# Altium PCB sixuanyi.PcbDoc
Units mil, origin at the board's own origin, x right, y up, seen from the top; angles counter-clockwise.
Board outline 6000 x 4000 mil, 2 copper layers (Top Layer, Bottom Layer); 73 components, 73 nets, 288 pads, 91 vias.
Unrouted connection lines stored in the file: 7.
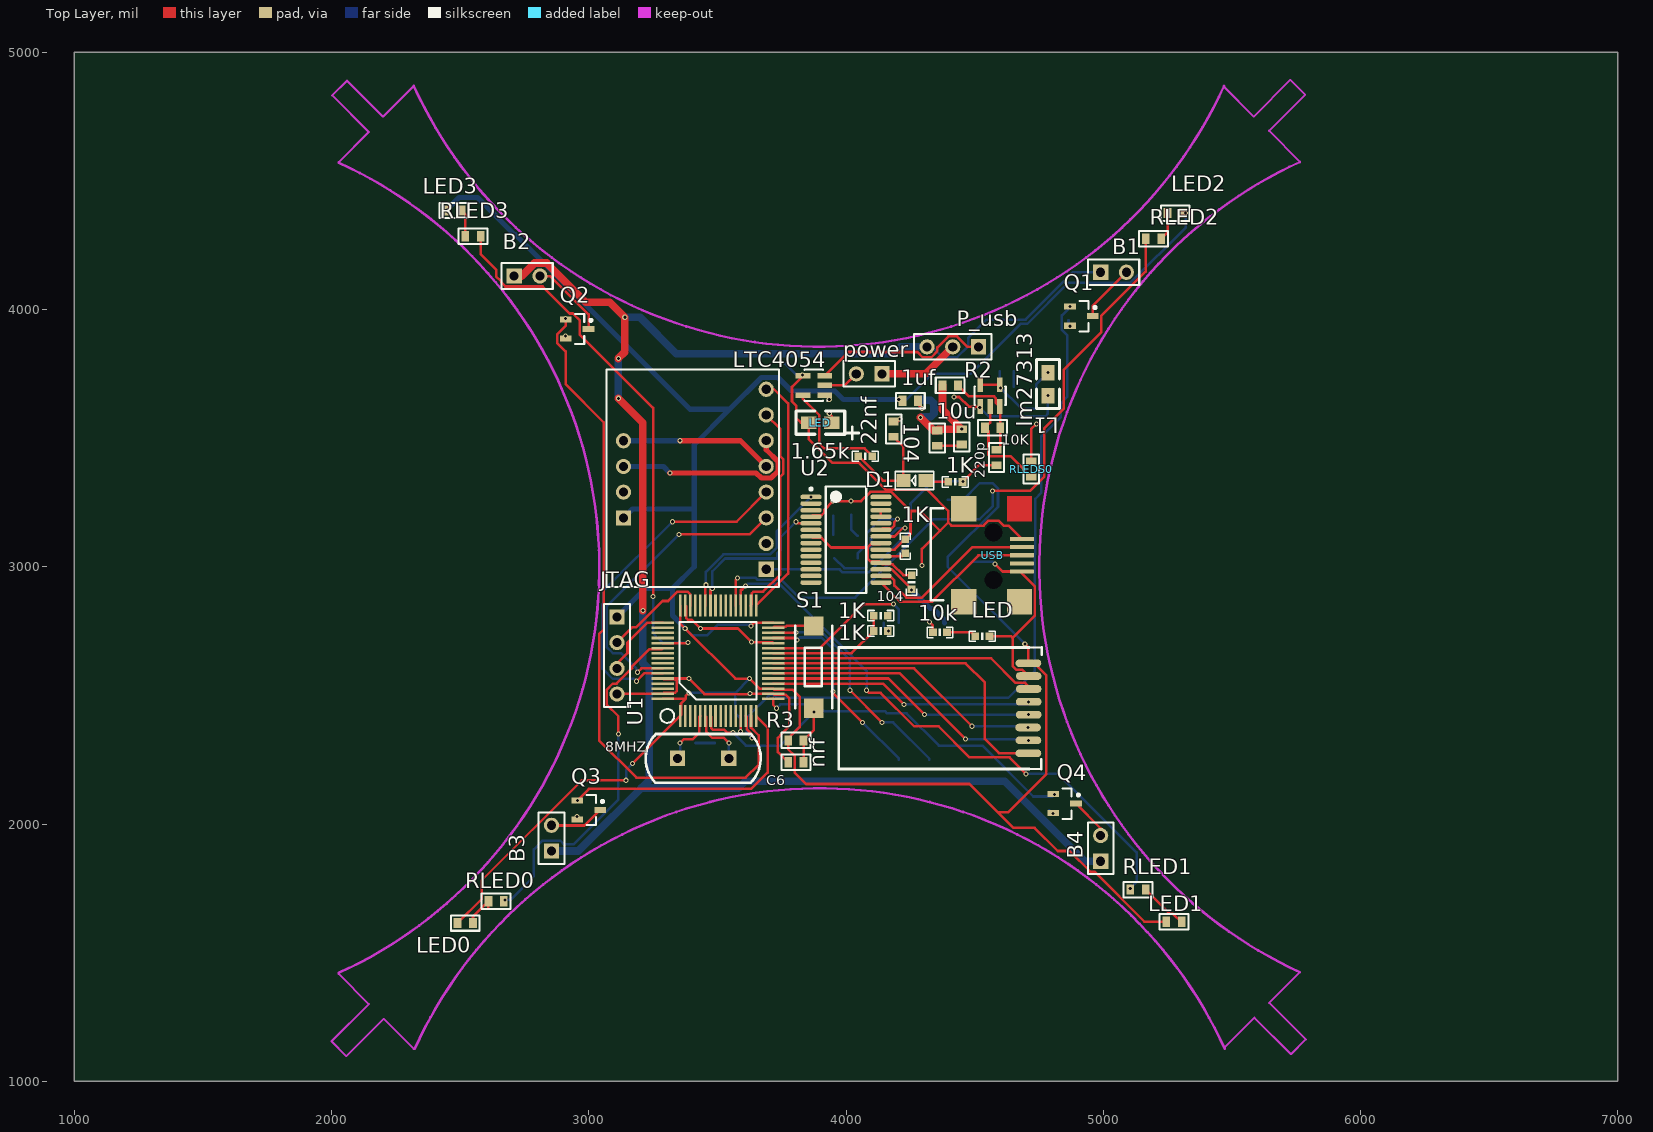
[diagram p0: Top Layer view]
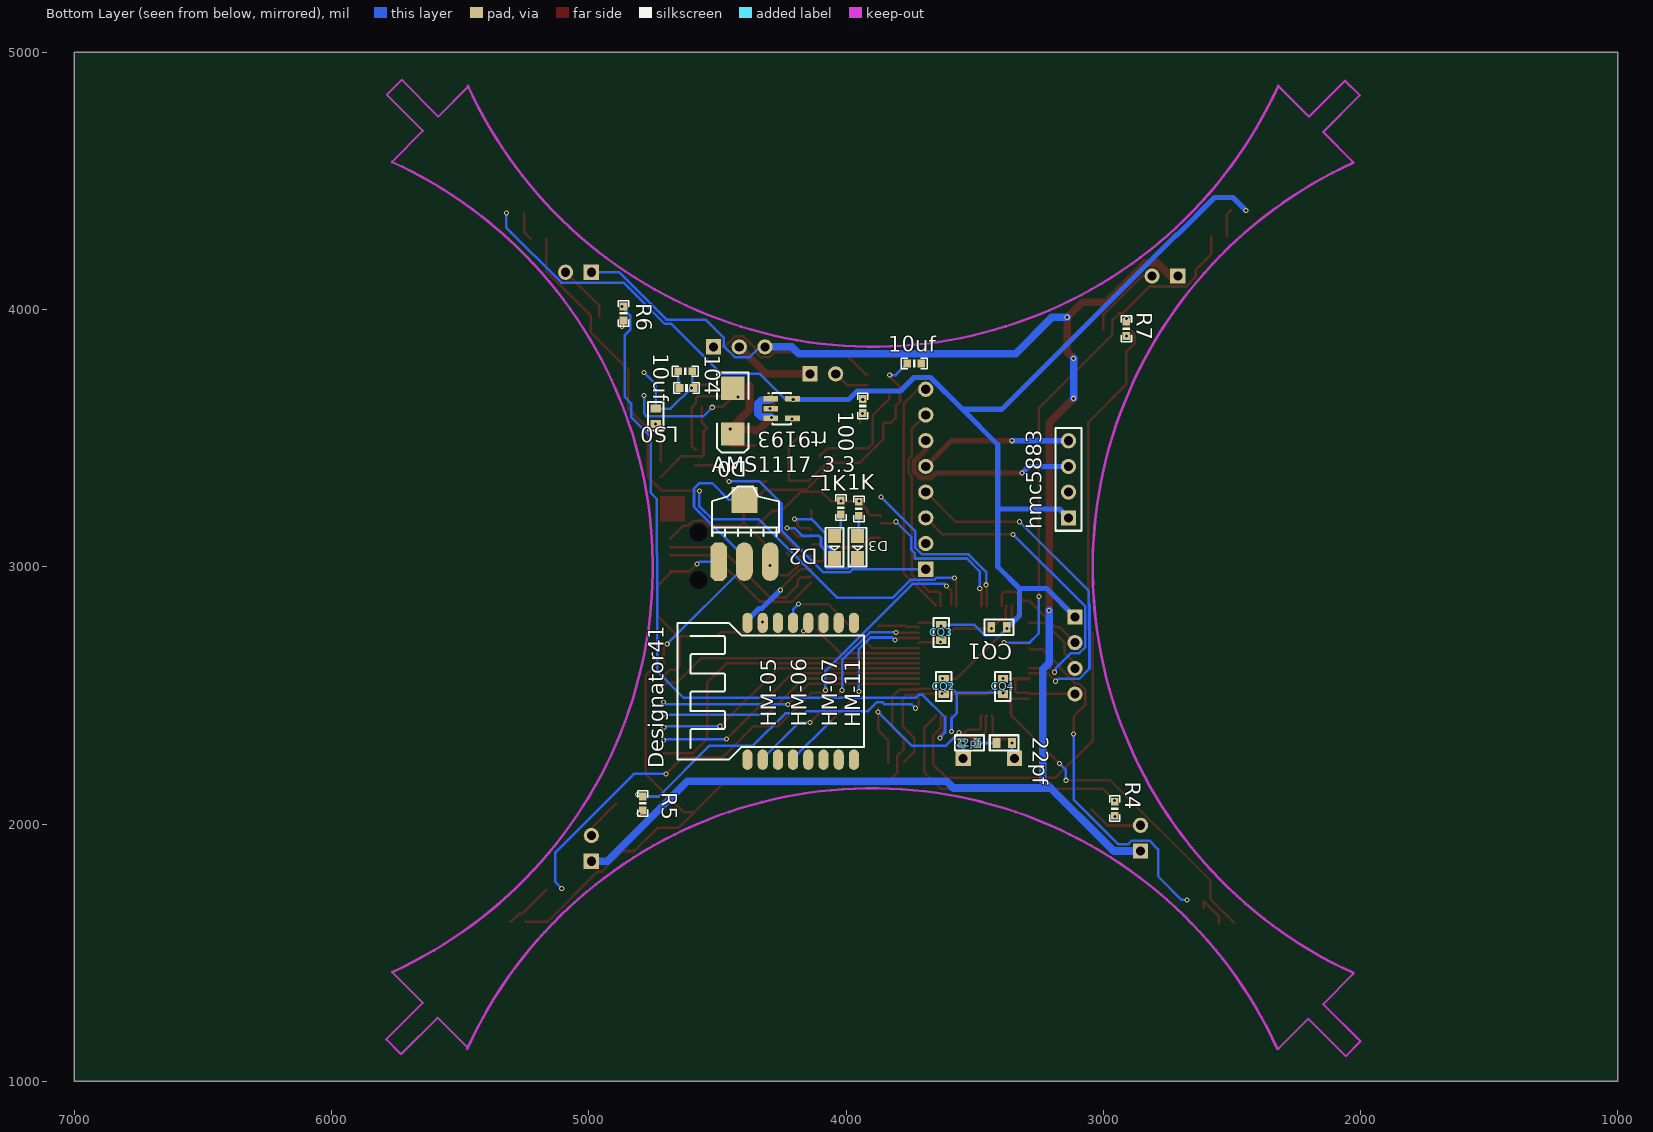
[diagram p1: Bottom Layer view, seen from below]

## Layer stack, top to bottom
Top Layer: signal copper 1.4
Dielectric: dielectric 12.6, FR-4, Dk 4.8
Bottom Layer: signal copper 1.4

## Board outline
1000,1000 7000,1000 7000,5000 1000,5000

## Design rules (kind name [scope] priority, off if disabled: settings)
Clearance [All] p1: gap=6
PolygonConnect [All] p1: connectstyle=Relief reliefconductorwidth=10 reliefentries=4 polygonreliefangle="90 Angle"
RoutingVias [All] p1: holewidth=28 width=50 viastyle="Through Hole" minholewidth=28 minwidth=50 maxholewidth=28 maxwidth=50
SilkscreenOverComponentPads SilkToSolderMaskClearance [IsPad] p1: minsilkscreentomaskgap=10
SolderMaskExpansion [All] p1: expansion=4
Width [All] p1: maxlimit=30 minlimit=10 preferedwidth=10
27 further rules are at their usual default settings.

## Classes and differential pairs
component class sixuanyi: 1.65k 1K 8MHZ 10K 10u 10uf 22pf 100 104 220p B2 C6 CQ1 CQ2 CQ3 CQ4 D0 D1 D2 D3 JTAG L1 LED LED0 LED1 LED2 LED3 lm27313 LS0 LTC4054 P_usb power Q1 Q2 Q3 Q4 R2 R3 RLED0 RLED1 RLED2 RLED3 RLEDS0 rt9193 S1 U1 U2 USB

## Components (designator, comment, footprint, x,y, rotation, side; value= is the part's Value field where it differs from the comment)
1.65k "R_USB1" 0603p 4075,3430 r0 top (schematic designator R_USB1)
1K "Comment" 0603p 4135,2750 r0 top
1K "Comment" 0603p 4135,2810 r0 top
1K "1K" 0603p 3950,3225 r90 bottom (schematic designator R_ttl4)
1K "1K" 0603p 4020,3230 r90 bottom (schematic designator R_ttl3)
1K "1K" 0603p 4230,3080 r90 top (schematic designator R_ttl2)
1K "1K" 0603p 4425,3330 r0 top (schematic designator R_ttl1)
1uf "Comment" 0603_WYN 4250,3645 r0 top
8MHZ "8MHZ" XTAL_D 3345,2255 r0 top
10k "Comment" 0603p 4365,2745 r0 top
10K "10K" 0603_WYN 4570,3540 r0 top (schematic designator R1)
10u "10uF" 0603_WYN 4450,3505 r270 top (schematic designator C3)
10uf "C_usb1_10uf" 0603p 3735,3790 r180 bottom (schematic designator C_usb1_10uf)
10uf "10uF" 0603p 4620,3695 r180 bottom (schematic designator C1)
22nf "Comment" 0603_WYN 4185,3535 r90 top
22pf "22pF" 0603_WYN 3520,2315 r180 bottom (schematic designator Cpf2)
22pf "22pF" 0603_WYN 3385,2315 r180 bottom (schematic designator Cpf1)
100 "R_usb2" 0603p 3935,3625 r270 bottom (schematic designator R_usb2)
104 "104" 0603P 4255,2940 r90 top (schematic designator C_usb1)
104 "104" 0603_WYN 4355,3500 r270 top (schematic designator C4)
104 "104" 0603p 4625,3760 r180 bottom (schematic designator C2)
220p "220pF" 0603_WYN 4585,3425 r90 top (schematic designator C5)
AMS1117_3.3 "Comment" AMS1117 4495,3020 r180 bottom
B1 "Comment" HDR1X2 4990,4145 r0 top
B2 "Comment" HDR1X2 2710,4130 r0 top
B3 "Comment" HDR1X2 2855,1895 r90 top
B4 "Comment" HDR1X2 4990,1855 r90 top
C6 "104" 0603_WYN 3805,2240 r180 top
CQ1 "104" 0603_WYN 3405,2765 r0 bottom
CQ2 "104" 0603_WYN 3620,2535 r270 bottom
CQ3 "104" 0603_WYN 3630,2745 r270 bottom
CQ4 "104" 0603_WYN 3390,2535 r90 bottom
D0 "MBR0520" SMB 4440,3605 r270 bottom
D1 "LED2" SMDLED 4310,3335 r180 top
D2 "LED2" SMDLED 4045,3120 r270 bottom
D3 "LED2" SMDLED 3955,3120 r270 bottom
Designator41 "Comment" HM_05_06_07_11 3930,2250 r90 bottom
hmc5883 "Comment" HDR1X4 3135,3190 r90 bottom
JTAG "Header 4" HDR1X4 3110,2805 r270 top
L1 "Inductor" 0805_WYN 4785,3755 r270 top
LED "Comment" 0603p 4530,2730 r0 top
LED "黄灯" 极性0805_WYN 3945,3560 r180 top (schematic designator LED_usb)
LED0 "绿灯" 0603_WYN 2520,1615 r0 top
LED1 "绿灯" 0603_WYN 5275,1620 r0 top
LED2 "绿灯" 0603_WYN 5280,4375 r180 top
LED3 "绿灯" 0603_WYN 2475,4385 r0 top
lm27313 "LM27313" SOT23-6 4560,3665 r0 top (schematic designator E_TURN1)
LS0 "绿灯" 0603_WYN 4740,3585 r270 bottom
LTC4054 "LTC4054" SOT23-6 3875,3705 r90 top
nrf "Comment" 24L01-L 4700,2450 r90 top
P_usb "P_usb" HDR1X3 4515,3855 r180 top
power "Header2" HDR1X2 4140,3750 r180 top
Q1 "JFET-N" SI2302 4915,3975 r0 top
Q2 "JFET-N" SI2302 2955,3925 r0 top
Q3 "JFET-N" SI2302 3000,2055 r0 top
Q4 "JFET-N" SI2302 4850,2080 r0 top
R2 "33K" 0603_WYN 4405,3705 r180 top
R3 "10K" 0603_WYN 3805,2325 r180 top
R4 "Comment" 0603p 2955,2060 r270 bottom
R5 "Comment" 0603p 4790,2080 r270 bottom
R6 "Comment" 0603p 4865,3985 r270 bottom
R7 "Comment" 0603p 2910,3925 r270 bottom
RLED0 "10R" 0603_WYN 2640,1700 r180 top
RLED1 "10R" 0603_WYN 5135,1745 r0 top
RLED2 "10R" 0603_WYN 5195,4275 r0 top
RLED3 "10R" 0603_WYN 2550,4285 r180 top
RLEDS0 "10R" 0603_WYN 4720,3380 r90 top
rt9193 "RT9193" SOT23-6 4250,3615 r270 bottom (schematic designator E_TURN2)
S1 "SW-PB" CLICK 3875,2450 r90 top
U1 "STM32_F103" LQFP64 3355,2420 r90 top
U2 "FT232RL" SSOP-28 4000,3105 r0 top
USB "usb mini" "USB - duplicate1" 4625,3275 r270 top
? "Comment" HDR1X8 3680,3000 r90 top

## Footprints (in the part's own frame and the unit in brackets; to place one, negate y for a bottom-side part, rotate by r counter-clockwise, add the part's x,y. Pads: shape width x height; smd on the part's side, far side on the other; paste and mask are expansions set on the pad)
24L01-L [mil]
  oval 30x100 smd: 1(175.17,-9.06) 2(125,-10) 3(75,-10) 4(25,-10) 5(-25,-10) 6(-74.8,-7.87) 7(-124.83,-9.06) 8(-174.83,-9.06)
  silkscreen extent -236,-61 236,728
0603_WYN [mil]
  rect 30x40 smd: 1(-30,0) 2(30,0)
  silkscreen extent -56,-30 56,30
0603p [mil]
  rect 30x30 smd: 1(-27,0) 2(27.5,-0.06)
  silkscreen extent -50,-20 50,20
0603P [mil]
  rect 30x30 smd: 1(-27,0) 2(27.5,-0.06)
  silkscreen extent -50,-20 50,20
0805_WYN [mil]
  rect 60x50 smd: 1(0,0) 2(90,0)
  silkscreen extent -50,-45 140,45
AMS1117 [mil]
  oct 65x150 smd: 1(0.03,-0.06)
  oval 65x150 smd: 2(100.03,-0.06) 3(200.03,-0.06)
  rect 100x100 smd: 4(100.03,239.94)
  silkscreen extent -26,100 234,293
CLICK [mil]
  rect 75x75 smd: 1(0,0) 2(320,0)
  silkscreen extent 0,-72 320,72
HDR1X2 [mm] "Connector; Header; 2 Posi"
  rect 1.5x1.5 hole 0.9: 1(0,0)
  round 1.5 hole 0.9: 2(2.54,0)
  silkscreen extent -1.27,-1.27 3.81,1.27
HDR1X3 [mm] "Connector; Header; 3 Position"
  rect 1.5x1.5 hole 0.9: 1(0,0)
  round 1.5 hole 0.9: 2(2.54,0) 3(5.08,0)
  silkscreen extent -1.27,-1.27 6.35,1.27
HDR1X4 [mm] "Connector; Header; 4 Position"
  rect 1.5x1.5 hole 0.9: 1(0,0)
  round 1.5 hole 0.9: 2(2.54,0) 3(5.08,0) 4(7.62,0)
  silkscreen extent -1.27,-1.27 8.89,1.27
HDR1X8 [mm]
  rect 1.5x1.5 hole 0.9: 1(-0.25,-0.25)
  round 1.5 hole 0.9: 2(2.29,-0.25) 3(4.83,-0.25) 4(7.37,-0.25) 5(9.91,-0.25) 6(12.45,-0.25) 7(14.99,-0.25) 8(17.53,-0.25)
  silkscreen extent -2,-1.52 19.5,15.5
HM_05_06_07_11 [mm]
  oval 2x1 smd: 1(0,11.5) 2(0,10) 3(0,8.5) 4(0,7) 5(0,5.5) 6(0,4) 7(0,2.5) 8(0,1) 9(13.513,1) 10(13.513,2.5) 11(13.513,4) 12(13.513,5.5) 13(13.513,7) 14(13.513,8.5) 15(13.513,10) 16(13.513,11.5)
  silkscreen extent 0,0 13.51,18.41
LQFP64 [mm] "LQFP6"
  rect 2.2x0.254 smd: 1(0,0) 2(0,-0.5) 3(0,-1) 4(0,-1.5) 5(0,-2) 6(0,-2.5) 7(0,-3) 8(0,-3.5) 9(0,-4) 10(0,-4.5) 11(0,-5) 12(0,-5.5) 13(0,-6) 14(0,-6.5) 15(0,-7) 16(0,-7.5) 33(10.9,-7.5) 34(10.9,-7) 35(10.9,-6.5) 36(10.9,-6) 37(10.9,-5.5) 38(10.9,-5) 39(10.9,-4.5) 40(10.9,-4) 41(10.9,-3.5) 42(10.9,-3) 43(10.9,-2.5) 44(10.9,-2) 45(10.9,-1.5) 46(10.9,-1) 47(10.9,-0.5) 48(10.9,0)
  rect 0.254x2.2 smd: 17(1.7,-9.2) 18(2.2,-9.2) 19(2.7,-9.2) 20(3.2,-9.2) 21(3.7,-9.2) 22(4.2,-9.2) 23(4.7,-9.2) 24(5.2,-9.2) 25(5.7,-9.2) 26(6.2,-9.2) 27(6.7,-9.2) 28(7.2,-9.2) 29(7.7,-9.2) 30(8.2,-9.2) 31(8.7,-9.2) 32(9.2,-9.2) 49(9.2,1.7) 50(8.7,1.7) 51(8.2,1.7) 52(7.7,1.7) 53(7.2,1.7) 54(6.7,1.7) 55(6.2,1.7) 56(5.7,1.7) 57(5.2,1.7) 58(4.7,1.7) 59(4.2,1.7) 60(3.7,1.7) 61(3.2,1.7) 62(2.7,1.7) 63(2.2,1.7) 64(1.7,1.7)
  silkscreen extent -0.68,-7.56 9.26,1.95
SI2302 [mm]
  rect 1.15x0.6 smd: 1(1.122,-0.016) 2(-1.128,0.934) 3(-1.128,-0.966)
  silkscreen extent -0.2,-1.52 1.47,1.48, body extent -0.7,-1.52 0.7,1.48, height 1.1
SMB [mm] "DO-214-AA/SMB; 2 C-Bend Leads; Body 5.3 x 3.6 mm, inc. leads (LxW)"
  rect 2.3x2.3 smd: 1(-2.25,0) 2(2.25,0)
  silkscreen extent -3.8,-1.55 4.1,1.55
SMDLED [mm]
  rect 1.4x1.27 smd: 1(0.001,-0.002) 2(2.211,-0.002)
  silkscreen extent -0.8,-0.89 3.01,0.89
SOT23-6 [mm] "SOT-23/SC-74A; 5 Leads; Body 3.1 x 3 mm, inc. leads (Lx"
  rect 0.55x1.45 smd: 1(-0.95,-1.075) 2(0,-1.075) 3(0.95,-1.075) 4(0.95,1.075) 5(-0.95,1.075)
  silkscreen extent -1.57,-1.35 1.55,0.9
SSOP-28 [mm] "FT232"
  oval 2.1x0.45 smd: 1(-3.45,4.225) 2(-3.45,3.575) 3(-3.45,2.925) 4(-3.45,2.275) 5(-3.45,1.625) 6(-3.45,0.975) 7(-3.45,0.325) 8(-3.45,-0.325) 9(-3.45,-0.975) 10(-3.45,-1.625) 11(-3.45,-2.275) 12(-3.45,-2.925) 13(-3.45,-3.575) 14(-3.45,-4.225) 15(3.45,-4.225) 16(3.45,-3.575) 17(3.45,-2.925) 18(3.45,-2.275) 19(3.45,-1.625) 20(3.45,-0.975) 21(3.45,-0.325) 22(3.45,0.325) 23(3.45,0.975) 24(3.45,1.625) 25(3.45,2.275) 26(3.45,2.925) 27(3.45,3.575) 28(3.45,4.225)
  silkscreen extent -3.57,-5.25 2,5.25, body extent -2.8,-5.25 2.8,5.25, height 2
"USB - duplicate1" [mm]
  rect 0.4x2.4 smd: 1(4.25,1.5) 2(5.05,1.5) 3(5.85,1.5) 4(6.65,1.5) 5(7.45,1.5)
  rect 2.5x2.5 smd: ""(1.25,-4.25) ""(10.45,1.25) ""(10.45,-4.25)
  round 0 hole 1.8: ""(3.6,-1.3) ""(8.3,-1.3)
  Top Layer region: 0,0 2.5,0 2.5,2.5 0,2.5
  silkscreen extent 1.2,-7.5 10.3,-6.3
XTAL_D [mil]
  rect 60x60 hole 36 paste+0: 1(0,0) 2(200,0)
  silkscreen extent -124,-95 324,95
极性0805_WYN [mil]
  rect 60x50 smd: 1(0,0) 2(90,0)
  silkscreen extent -105,-45 140,65

## Part data
1.65k 100: library part Res2, "Resisto"
1K 1K 1K 1K: library part Res2, "Resis"
8MHZ: library part XTAL, "Crystal Oscillato"
10K R2 R3 RLED0 RLED1 RLED2 RLED3 RLEDS0: library part RES_WYN
10u 22pf 22pf 104 220p C6 CQ1 CQ2 CQ3 CQ4: library part CAP_WYN
10uf: library part Cap, "Capacito"
10uf 104 104: library part CAP_WY
D0: library part "D Schottky", "Schottky Diode"
D1 D2 D3: "Typical RED, GREEN, YELLOW, AMBER GaAs LED"
JTAG: "Header, 4-Pin"
L1: "Inducto"
LED: library part LED1, "Typical RED GaA"
LED0 LED1 LED2 LED3 LS0: library part LED_WYN, "Typical RED, GREEN, YELLOW, AMBER GaAs LED"
P_usb: library part "Header 3", "Header, 3-Pin"
Q1 Q2 Q3 Q4: "N-Channel JFET"
S1: "Switch"

## Via types
v1: diameter 19.68, hole 11.81, Top Layer to Bottom Layer, 91 vias

## Nets (pads, with @x,y where several pads share a name; then routed paths per layer and width w, separated by ;. In a path a pad name is that pad's centre, name@x,y a point inside that pad or via, vN(x,y) a via of type N, cw(c..) or ccw(c..) an arc to the next point about the centre after c; other vN are vias at no path point)
AD0: ?.7 U1.34 | length 842.4
  Top Layer w10: U1.34 3634.28,2852.82 3634.28,2897 3640.72,2903.44 3677.74,2903.44 3745,2970.7 3745,3351.23 3756.37,3362.6 3756.37,3417.71 3745,3429.08 3745,3535 ?.7
ADC: 1K.1@4108,2750 1K.1@4108,2810 U1.26 | length 486.4
  Top Layer w10: U1.26 4022.09,2664.09 4108,2750 1K.1@4108,2810
BAT: P_usb.2 power.1 | length 318.5
  Top Layer w30: power.1 4310,3750 P_usb.2
CHG5V: 1K.2@3949.94,3252.5 1K.2@4019.94,3257.5 1K.2@4230.06,3107.5 10uf.1@3762,3790 AMS1117_3.3.3 LED.2@3855,3560 LTC4054.4 U2.4 U2.20 USB.1 | length 2490.4
  Top Layer w10: LTC4054.4 3790,3699.72 3790,3642.63 3806,3626.63 3806,3579 3825,3560 3855,3560 3855,3497.37 3948.37,3404 4051.37,3404 4156.31,3299.06 4315.94,3299.06 4397.46,3217.54 4397.46,3172.02 ; U2.4 3869.91,3200.3 3904.88,3200.3 3916.51,3211.93 3916.51,3221.51 v1(3950,3255) 4058.92,3255 4095.12,3291.2 4176.53,3291.2 4250.84,3216.89 ; U2.20 4189.18,3066.61 4230.06,3107.5 4250.84,3128.28 4250.84,3216.89 ; v1(4295,3005) 4295,3069.55 4365.45,3140 ; USB.1 4631.73,3160 4612.75,3160 4593.05,3179.7 4554.59,3179.7 4534.88,3160 4409.48,3160 4397.46,3172.02 ; 4250.84,3216.89 4288.56,3216.89 4365.45,3140 ; 4365.45,3140 4397.46,3172.02
  Bottom Layer w10: 10uf.1@3762,3790 3807,3745 v1(3830,3745) ; v1(4295,3005) AMS1117_3.3.3
  other v1: 4020,3255
D+: U2.15 USB.3 | length 654
  Top Layer w10: U2.15 4210.49,2864 4301.63,2864 4302.63,2865 4335,2865 4514.69,3044.68 USB.3
D-: U2.16 USB.2 | length 676.1
  Top Layer w10: U2.16 4141.56,2958.52 4176.53,2958.52 4188.17,2946.89 4188.17,2926.83 4235,2880 4295,2880 4491.18,3076.18 USB.2
GND: 1.65k.1 1K.2@4162.5,2749.94 1uf.2 10K.1 10u.2 10uf.1@4647,3695 10uf.2@3707.5,3789.94 22nf.1 22pf.1@3415,2315 22pf.2@3490,2315 104.1@4652,3760 104.2@4255.06,2967.5 104.2@4355,3470 ?.2 AMS1117_3.3.1 C6.2 CQ1.2 CQ2.2 CQ3.2 CQ4.2 D1.2 Designator41.12 hmc5883.2 JTAG.4 LED.2@4557.5,2729.94 lm27313.2 LTC4054.2 nrf.2 power.2 Q1.3 Q2.3 Q3.3 Q4.3 R4.2 R5.2 R6.2 R7.2 RLEDS0.1 rt9193.2 S1.2 U1.18 U1.28 U1.31 U1.47 U1.60 U1.63 U2.7 U2.18 U2.21 U2.25 U2.26 USB.5 | length 4371.1
  Top Layer w10: JTAG.4 3111.61,2506.61 U1.63 3291.76,2510.3 3335.93,2510.3 3342.38,2516.74 3342.38,2555.54 3335.93,2561.98 3291.76,2561.98 U1.60 v1(3389.33,2565.67) ; U1.47 3378.37,2845.45 3378.37,2801.27 3384.81,2794.83 3400.17,2794.83 v1(3435,2760) 3580,2760 v1(3632.85,2707.15) 3713.52,2707.15 U1.28 ; v1@3390,2565 3450,2505 3625,2505 v1(3626.61,2506.61) U1.18 3720.89,2502.93 3765.07,2502.93 3780,2488 3780,2380.56 3749,2349.56 3749,2349 3735,2335 3735,2280 C6.2 ; U1.31 3720.89,2766.2 3765.07,2766.2 3768.86,2770 S1.2 ; U2.7@3869.91,3112.06 3904.88,3112.06 3942.1,3074.84 4083.49,3074.84 ; LTC4054.2 3995,3705 power.2 ; 1.65k.1 4142.94,3335.06 D1.2 4222.96,3467.04 22nf.1 ; U2.21@4131.97,3088.35 4097,3088.35 4083.49,3074.84 ; U2.25 U2.26 ; 104.2@4255.06,2967.5 4223.13,2967.5 4180.93,3009.7 4141.56,3009.7 U2.18 4130.09,3021.17 4095.12,3021.17 4083.49,3032.8 4083.49,3074.84 ; 1uf.2 4280,3630 v1(4295,3615) ; 104.2@4355,3470 10u.2@4445,3470 ; LED.2@4557.5,2729.94 4641.56,2729.94 4648.06,2723.44 ; lm27313.2 4560,3560 10K.1 4554,3526 4554,3435.44 4560.44,3429 4641,3429 RLEDS0.1 ; v1(4580,3010) 4608.31,2981.69 USB.5 4684.06,2974.17 4734.43,2923.8 4734.43,2809.81 4648.06,2723.44 ; nrf.2 4685.83,2599.17 4663.29,2599.17 4648.06,2614.4 4648.06,2723.44
  Bottom Layer w10: 22pf.1@3415,2315 22pf.2@3490,2315 ; Designator41.12 4146.53,2768.47 v1(4165,2750) ; AMS1117_3.3.1 4570.06,3019.94 v1(4580,3010) ; 10uf.1@4652,3700 104.1@4652,3760 ; R5.2 4802.56,2040 v1(4805,2040) ; R6.2 4865.06,3939.94 v1(4870,3935)
  other v1: 2955,2030 2910.06,3897.5
IIC_SCL: ?.3 U1.58 | length 1191.8
  Top Layer w10: v1(3190,2590) 3205.04,2605.04 U1.58 ; v1(3350,3126.06) 3625.74,3126.06 ?.3
  Bottom Layer w10: v1(3190,2590) 3185.04,2594.96 3185.04,2605.04 3125.61,2664.47 3093.21,2664.47 3069.47,2688.21 3069.47,2845.53 v1(3350,3126.06)
IIC_SDA: ?.4 U1.59 | length 1363.4
  Top Layer w10: v1(3185,2555) 3215.35,2585.35 U1.59 ; v1(3325,3175) 3574.68,3175 ?.4
  Bottom Layer w10: v1(3185,2555) 3175.53,2564.47 3093.21,2564.47 3053.47,2604.21 3053.47,2854.37 3055.69,2856.58 3055.69,2905.69 v1(3325,3175)
INT: ?.8 U1.33 | length 945.5
  Top Layer w10: U1.33 3775,2973.86 3775,3635 3719.84,3690.16 ?.8
JTCK: JTAG.3 U1.49 | length 286.6
  Top Layer w10: JTAG.3 3110,2623.94 3150.53,2664.47 3150.53,2705.53 3227.2,2782.2 U1.49
JTDI: U1.50
JTDO: U1.55
JTMS: JTAG.2 U1.46 | length 414.9
  Top Layer w10: JTAG.2 3170,2765 3185,2765 3286.88,2866.88 3308.88,2866.88 3345.44,2903.44 3384.24,2903.44 3394.37,2893.31 U1.46
JTRST: U1.56
LED0: RLED0.1 U1.54 | length 1409.8
  Top Layer w10: v1(3115,2350) 3115,2418.94 3069.47,2464.47 3069.47,2521.79 3093.21,2545.53 3107.84,2545.53 3168.13,2605.82 3168.13,2612.04 3236.19,2680.09 3284.39,2680.09 U1.54
  Bottom Layer w10: v1(2675,1705) 2695,1705 2786.91,1796.91 2786.91,1901.53 2820.92,1935.53 2889.08,1935.53 2903.61,1921 2941,1921 3115,2095 v1(3115,2350)
LED1: RLED1.1 U1.36 | length 2231.7
  Top Layer w10: U1.36@3591.22,2854.13 3591.22,2911.22 3596.22,2911.22 v1(3610,2925) ; v1(4080,2520) 4090,2510 4135,2510 4265,2380 4360,2380 4480.83,2259.17 4635.83,2259.17 v1(4700,2195)
  Bottom Layer w10: v1(3610,2925) 3618.63,2933.63 3741.37,2933.63 4080,2595 v1(4080,2520) ; v1(4700,2195) 4825,2195 5130,1890 5130,1775 v1(5105,1750)
LED2: RLED2.1 U1.37 | length 2653
  Top Layer w10: U1.37 3571.53,2950.35 v1(3578.09,2956.91) ; v1(4570,3295) 4715.56,3295 4769.89,3349.33 4769.89,3537.35 4846.2,3613.67 4846.2,3765.15 4993.05,3912 4993.05,3975.96 5165,4147.91 RLED2.1
  Bottom Layer w10: v1(3578.09,2956.91) 3648.48,2956.91 3655.76,2949.63 3748,2949.63 3817.63,2880 4035,2880 4340,3185 4520,3185 4570,3235 v1(4570,3295)
LED3: RLED3.1 U1.53 | length 2158.5
  Top Layer w10: RLED3.1 2580,4215 2640,4155 2640,4129.17 2659.05,4110.13 2659.05,4106.34 2675.92,4089.47 2820.53,4089.47 2925.42,3984.58 2937.78,3984.58 2965.54,3956.83 2965.54,3901.56 3250,3617.09 v1(3250,2885) ; U1.53 v1@3383.46,2703.46
  Bottom Layer w10: v1(3250,2885) 3250,2741.53 3286.53,2705 v1(3385,2705)
LS0: 
LS1: U1.11
LS2: U1.2
LS3: U1.45
LY_R1: 10k.1 Designator41.15 | length 45.4
  Top Layer w10: v1(4325,2785) 4338,2772 10k.1
LY_R2: 10k.2 LED.1@4503,2730 | length 116.7
  Top Layer w10: 10k.2 4488.06,2744.94 LED.1@4503,2730
MCU_INT: Designator41.13 U1.27 | length 620.2
  Top Layer w10: U1.27 3898.78,2683.78 4070,2855 v1(4185,2855)
  Bottom Layer w10: v1(4185,2855) 4205.59,2834.41 Designator41.13
NetB1_2: B1.2 Q1.1 | length 224.8
  Top Layer w10: Q1.1 4959.17,4014.17 B1.2
NetB2_2: B2.2 Q2.1 | length 307.4
  Top Layer w10: B2.2 2850,4130 2999.17,3980.83 Q2.1
NetB3_2: B3.2 Q3.1 | length 213.3
  Top Layer w10: B3.2@2855.84,1994.16 2982.78,1994.16 3043,2054.37 Q3.1
NetB4_2: B4.2 Q4.1 | length 164.1
  Top Layer w10: Q4.1 4990,1983.54 B4.2
NetC5_2: 10K.2 220p.2 lm27313.3 R2.1 | length 378.1
  Top Layer w10: R2.1 4477.78,3662.22 4575.38,3662.22 4581.83,3655.78 4581.83,3638.25 lm27313.3 ; 220p.2 4600,3470 10K.2 lm27313.3@4600,3620.08
NetD0_1: D0.1 L1.2 lm27313.1 | length 471.7
  Top Layer w10: v1(4420,3660) 4440,3660 4477.32,3622.68 lm27313.1
  Bottom Layer w10: v1(4520,3620) 4555,3585 4775,3585 4785,3595 v1(4785,3665)
NetD1_1: 1K.1@4398,3330 D1.1 | length 90.1
  Top Layer w10: D1.1 4315.03,3330 1K.1@4398,3330
NetD2_1: 1K.1@4020,3203 D2.1 | length 93.4
  Bottom Layer w10: 1K.1@4020,3203 4020,3145.03 D2.1
NetD2_2: D2.2 U2.23 | length 343
  Top Layer w10: U2.23 4141.56,3149.12 4176.53,3149.12 4188.17,3160.75 4188.17,3173.17 v1(4200,3185)
  Bottom Layer w10: D2.2 4045.06,3051.85 4081.06,3087.85 4081.06,3131.06 4135,3185 v1(4200,3185)
NetD3_1: 1K.1@3950,3198 D3.1 | length 73
  Bottom Layer w10: D3.1@3950,3125.03 1K.1@3950,3198
NetD3_2: D3.2 U2.22 | length 513.6
  Top Layer w10: U2.22 4188.36,3117.8 4220.56,3150 v1(4230,3150)
  Bottom Layer w10: D3.2 3993.62,2994.4 4074.62,2994.4 4081.06,3000.84 4081.06,3065.23 4097.06,3081.23 4097.06,3112.06 4105,3120 4170,3120 4200,3150 v1@4225,3150
NetLED0_2: LED0.2 RLED0.2 | length 134.9
  Top Layer w10: LED0.2 2550,1640 RLED0.2 2610,1675
NetLED1_2: LED1.2 RLED1.2 | length 191.8
  Top Layer w10: RLED1.2 5259,1651 5271,1651 5302,1620 LED1.2
NetLED2_2: LED2.2 RLED2.2 | length 110.4
  Top Layer w10: RLED2.2 5250,4300 LED2.2
NetLED3_2: LED3.2 RLED3.2 | length 106.2
  Top Layer w10: LED3.2 2520,4370 RLED3.2
NetLED_usb_1: 100.2 LED.1@3945,3560 | length 39.1
  Top Layer w10: v1(3935,3595) 3945,3585 LED.1@3945,3560
NetLS0_2: LS0.2 RLEDS0.2 | length 153.3
  Top Layer w10: RLEDS0.2 4720,3535 v1(4740,3555)
NetLTC4054_1: 100.1 LTC4054.1 | length 25
  Top Layer w10: LTC4054.1 v1(3934.92,3650) v1@3935,3650
NetLTC4054_3: LTC4054.3 P_usb.1 | length 703.5
  Top Layer w10: LTC4054.3 4009.92,3835 4277.69,3835 4298.21,3814.47 4331.79,3814.47 4355.53,3838.21 4355.53,3852.84 4398.21,3895.53 4431.79,3895.53 4472.31,3855 P_usb.1
NetLTC4054_5: 1.65k.2 LTC4054.5 | length 441.7
  Top Layer w10: LTC4054.5 3832.68,3652.88 3896,3589.56 3896,3479 3915,3460 4072.44,3460 1.65k.2
NetR_ttl2_1: 1K.1@4230,3053 U2.19 | length 99.1
  Top Layer w10: U2.19 4218.02,3041.02 1K.1@4230,3053
NRF_CE: nrf.3 U1.25 | length 1052.3
  Top Layer w10: U1.25 4563.59,2644.41 4659,2549 4696,2549 nrf.3@4720,2525
NRF_CS: nrf.4 U1.20 | length 1026.3
  Top Layer w10: U1.20 4144.02,2545.98 v1(4225,2465)
  Bottom Layer w10: v1(4225,2465) 4710,2465
  other v1: 4710,2475
NRF_IRQ: nrf.8 U1.24 | length 1265.5
  Top Layer w10: U1.24 4465.28,2624.72 4540,2550 4540,2330 4594.83,2275.17 nrf.8
PWMA: Q1.2 R6.1 U1.14 | length 2878.1
  Top Layer w10: U1.14 3614.59,2416.32 3614.59,2367.78 3635,2347.37 v1(3635,2335)
  Bottom Layer w10: v1(3635,2335) 3615,2355 3615,2415 3701.91,2501.91 3717,2501.91 3726.91,2492 3726.91,2490.72 4630.72,2490.72 4734.41,2594.41 4734.41,3048.76 4735.93,3050.28 4735.93,3264.42 4759.41,3287.9 4759.41,3506.62 4835.46,3582.66 4835.46,3635.58 4860,3660.12 4860,3900.16 4839.06,3921.09 4839.06,3977.06 4870.59,4008.58 v1(4870.59,4011.77)
PWMB: Q2.2 R7.1 U1.15 | length 2652.3
  Top Layer w10: v1(2910,3965) 2910,3936.38 2876.95,3903.34 2876.95,3870.6 2910,3837.55 2910,3709.64 3058.21,3561.44 3058.21,2756.97 3040,2738.77 3040,2325 3185,2180 3610,2180 3660,2230 3660,2345 3630.59,2374.41 U1.15
  Bottom Layer w10: R7.1 v1(2910,3965)
PWMC: Q3.2 R4.1 U1.16 | length 1022.8
  Top Layer w10: v1(2955.59,2091.77) 3000.14,2136.32 3631.32,2136.32 3695,2200 3695,2375.28 U1.16
PWMD: Q4.2 R5.1 U1.17 | length 1287.3
  Top Layer w10: U1.17 3717.2,2462.8 v1(3730,2450)
  Bottom Layer w10: v1(3730,2450) 3745,2465 3850.28,2465 3859,2473.72 3878.72,2473.72 3913.91,2438.53 4151.47,2438.53 4160,2430 4236.09,2430 4361.09,2305 4530,2305 4728,2107 R5.1 4802,2107 v1(4810,2115)
RESET: C6.1 R3.1 S1.1 U1.7 | length 750.8
  Top Layer w10: U1.7 3476.8,2416.32 3476.8,2372.14 3483.24,2365.69 3527.42,2365.69 3538.11,2355 v1(3560,2355) ; C6.1 R3.1 3875,2365 v1(3875,2435) S1.1
  Bottom Layer w10: v1@3563.75,2351.88 3610.62,2305 3745,2305 v1(3875,2435)
rt_4: 22nf.2 rt9193.4 | length 29.1
  Top Layer w10: 22nf.2 4200,3565 v1(4210,3575)
SPI1_MISO: nrf.7 U1.22 | length 1097.6
  Top Layer w10: U1.22 4209.65,2585.35 v1(4465,2330)
  Bottom Layer w10: v1(4465,2330) v1@4709.06,2330
  other v1: 4709.06,2325.17
SPI1_MOSI: nrf.6 U1.23 | length 1096
  Top Layer w10: U1.23 4264.96,2605.04 v1(4490,2380)
  Bottom Layer w10: v1(4490,2380) 4720,2380
  other v1: 4707.87,2375.2
SPI1_SCK: nrf.5 U1.21 | length 1056.1
  Top Layer w10: U1.21 4164.33,2565.67 v1(4305,2425)
  Bottom Layer w10: v1(4305,2425) v1@4715,2425
  other v1: 4710,2425
U1_RX: U1.43 U2.1 | length 699
  Top Layer w10: U1.43 3453.43,2928.43 v1(3455,2930)
  Bottom Layer w10: v1(3455,2930) 3455,2980 3523,3048 3705,3048 3730.37,3073.37 3730.37,3137.54 v1(3864.17,3271.34)
U1_TX: U1.42 U2.5 | length 643.6
  Top Layer w10: U1.42 3473.11,2908.11 v1(3480,2915) ; v1(3805,3175) 3811.02,3168.98 U2.5
  Bottom Layer w10: v1(3480,2915) 3480,2982.37 3529.63,3032 3732,3032 3732,3052.37 3746.37,3066.74 3746.37,3116.37 v1(3805,3175)
U3_RX: Designator41.2 U1.30 | length 883.5
  Top Layer w10: U1.30 3802.83,2742.83 v1(3805,2745) ; v1(4015,2520) v1(4140,2395)
  Bottom Layer w10: v1(3805,2745) 3907.37,2745 4015,2637.37 v1(4015,2520) ; v1(4140,2395) 4182.73,2395 4323.7,2254.03 Designator41.2
U3_TX: Designator41.4 U1.29 | length 789.3
  Top Layer w10: U1.29 3801.85,2723.15 v1(3810,2715) ; v1@3950,2509.62 v1(4064.62,2395)
  Bottom Layer w10: v1(3810,2715) 3820,2725 3904.75,2725 3950,2679.75 v1(3950,2515) ; v1(4064.62,2395) 4205.59,2254.03 Designator41.4
U4_RX: U1.52
U4_TX: U1.51
VCC3.3: 1uf.1 104.1@4255,2913 AMS1117_3.3.2 AMS1117_3.3.4 CQ1.1 CQ2.1 CQ3.1 CQ4.1 Designator41.9 Designator41.16 hmc5883.1 JTAG.1 LED0.1 LED1.1 LED2.1 LED3.1 nrf.1 R3.2 rt9193.5 U1.1 U1.13 U1.19 U1.32 U1.48 U1.64 U2.17 | length 12305.6
  Top Layer w10: LED0.1 2584,1709 2584,1781.31 2972.69,2170 v1(3145,2170) ; v1(3170,2235) U1.1 3358.68,2423.68 3358.68,2467.86 3376.93,2486.11 3376.93,2486.93 ; U1.64 3376.93,2486.93 ; U1.48 3355,2780 v1(3375,2760) 3570,2565 v1(3625,2565) 3663.7,2526.3 U1.19 3720.89,2522.61 3792.39,2522.61 3820,2495 3820,2376.98 R3.2@3771.51,2328.49 ; v1(3390,2510) 3376.93,2496.93 3376.93,2486.93 ; v1@3591.22,2361.22 U1.13 ; v1(3630,2770) 3642.2,2782.2 U1.32 ; R3.2 3775,2290.56 3801,2264.56 3801,2199 3844.42,2155.58 4479.95,2155.58 4590.54,2045 ; U2.17 4178.16,2989.84 104.1@4255,2913 ; v1(4205,3650) 4210,3645 1uf.1 ; 4650.49,1985 4733.2,1985 4823.2,1895 4868.94,1895 4949.47,1814.47 4965.53,1814.47 5160,1620 LED1.1 ; 4650.49,1985.04 4590.54,2045 ; v1(4695,2700) 4709.06,2685.94 nrf.1 ; nrf.1@4731.6,2625.17 4777.7,2579.07 4777.7,2192.7 4630,2045 4590.54,2045
  Bottom Layer w10: v1(3145,2170) 3145,2210 v1@3165,2230 ; v1(3375,2760) 3401,2734 3461,2734 3502,2775 CQ3.1 ; v1(3390,2510) 3570,2510 ; v1(3590,2360) 3590,2410 3570,2430 3570,2510 ; v1(3625,2565) 3570,2510 ; v1(4205,3650) 4234.99,3650 4334.85,3749.86 4484.47,3749.86 4679.22,3944.61 4704.66,3944.61 4864.52,4104.47 5106.79,4104.47 5320,4317.69 v1(5320,4375) ; AMS1117_3.3.4 4454.94,3259.94 4520,3325 4569.48,3325 4590.84,3303.63 4590.84,3233.22 4394.97,3037.34 AMS1117_3.3.2 4394.97,3000.03 v1(4695,2700)
  Bottom Layer w20: v1(2445,4385) 2495,4435 2567.63,4435 2711.74,4290.89 2715.24,4290.89 3393.78,3612.35 3547.65,3612.35 ; JTAG.1 3220,2915 3325,2915 ; hmc5883.1 3170,3225 3406.91,3225 ; v1(3375,2760) 3325,2810 3325,2915 ; v1(4205,3650) 3989.63,3650 3956.63,3683 3788.06,3683 3735.37,3735.69 3670.98,3735.69 3547.65,3612.35 ; v1(4255,2910) 4327.63,2837.37 4338.48,2837.37 4382.76,2793.1 Designator41.16 ; 3325,2915 3410,3000 3410,3474.7 3547.65,3612.35
VCC3.7: 1K.2@4162.5,2809.94 10uf.2@4592.5,3694.94 104.2@4597.5,3759.94 B1.1 B2.1 B3.1 B4.1 L1.1 lm27313.4 lm27313.5 LS0.1 P_usb.3 | length 7380.7
  Top Layer w10: lm27313.5 lm27313.4
  Top Layer w30: B2.1 2738.54,4130 2789.07,4180.53 2836.24,4180.53 2988.53,4028.24 3081.76,4028.24 v1(3140,3970) 3140,3835 v1(3115,3810) ; v1(3115,3655) 3210,3560 v1(3210,2830)
  Bottom Layer w10: P_usb.3 4333.94,3855 4374.47,3814.47 4431.79,3814.47 4474.47,3857.16 4474.47,3889.08 4546,3960.61 4698.03,3960.61 4882.42,4145 B1.1 ; 104.2@4597.5,3759.94 4597.5,3698.94 4681.44,3615 LS0.1 4740,3710 v1(4785,3755)
  Bottom Layer w30: B3.1 2959.23,1895 3235,2170.77 3235,2600.84 3210,2625.84 v1(3210,2830) ; v1(3115,3655) v1(3115,3810) ; v1(3140,3970) 3199.04,3970 3340.4,3828.64 4184.19,3828.64 4210.56,3855 P_usb.3 ; 3204.23,2140 3582.32,2140 3608.43,2166.11 4616.75,2166.11 4927.87,1855 B4.1
  other v1: 4600,3695
VCC5: 1K.2@4452.5,3329.94 10u.1 104.1@4355,3530 220p.1 ?.1 D0.2 R2.2 rt9193.1 rt9193.3 | length 1663.6
  Top Layer w10: 1K.2@4452.5,3329.94 4517.57,3395 220p.1
  Top Layer w30: v1(4290,3580) 4340,3530 104.1@4355,3530 ; 104.1@4360,3535 v1(4450,3535) 4375,3610 R2.2
  Bottom Layer w10: ?.1 3975.24,2990.16 3987,2978.4 4087.88,2978.4 4250.84,3141.37 4250.84,3245.84 4336.84,3331.84 v1(4455,3331.84)
  Bottom Layer w30: rt9193.1 4297.9,3646.83 4329.56,3646.83 4341.87,3634.52 4341.87,3595.47 4329.56,3583.17 rt9193.3@4293.17,3583.17
VCC_3.3V: 
XCL: ?.6 hmc5883.3 | length 767.9
  Top Layer w20: v1(3315,3365) 3650.61,3365 3670.98,3344.63 3708.7,3344.63 3735.37,3371.3 3735.37,3409.02 3689.84,3454.54 ?.6
  Bottom Layer w20: hmc5883.3 3290,3390 v1(3315,3365)
XDA: ?.5 hmc5883.4 | length 596.2
  Top Layer w20: v1(3355,3490) 3590,3490 ?.5
  Bottom Layer w20: hmc5883.4 v1(3355,3490)
XTAL1: 8MHZ.1 22pf.2@3355,2315 U1.5 | length 208.1
  Top Layer w10: v1(3355,2315) 3370,2330 3405,2330 3430.05,2355.05 3430.05,2416.32 U1.5
  Bottom Layer w10: 8MHZ.1@3355,2265 v1(3355,2315)
XTAL2: 8MHZ.2 22pf.1@3550,2315 U1.6 | length 229.3
  Top Layer w10: U1.6 3457.11,2416.32 3457.11,2357.89 3480,2335 3525,2335 v1(3545,2315)
  Bottom Layer w10: 8MHZ.2 v1(3545,2315)
pads on no net: Designator41.1 Designator41.3 Designator41.5 Designator41.6 Designator41.7 Designator41.8 Designator41.10 Designator41.11 Designator41.14 U1.3 U1.4 U1.8 U1.9 U1.10 U1.12 U1.35 U1.38 U1.39 U1.40 U1.41 U1.44 U1.57 U1.61 U1.62 U2.2 U2.3 U2.6 U2.8 U2.9 U2.10 U2.11 U2.12 U2.13 U2.14 U2.24 U2.27 U2.28 USB. USB.4

## Keep-outs
Keep-Out Layer:
  lines w7.87: 2027.85,1421.1 2027.85,1417.15 2145,1300 2000,1155 2057.5,1097.5 2202.5,1242.5 2319.19,1125.81 2323.14,1125.81 ; 2027.91,4570.57 2027.91,4572.91 2145,4690 2002.5,4832.5 2060,4890 2200,4750 2319.05,4869.05 2320.09,4869.05 ; 5469.48,4868.94 5469.48,4865.52 5585,4750 5727.5,4892.5 5785,4835 5645,4695 5764.76,4575.24 5764.76,4573.66 ; 5470,1128.37 5470,1130 5587.5,1247.5 5730,1105 5787.5,1162.5 5645,1305 5764.19,1424.19 5764.7,1424.19
  lines w10: 2027.85,1421.1 ccw(c1311.06,2995.85) 2027.91,4570.57 ; 2320.01,4868.99 ccw(c3894.76,5585.79) 5469.48,4868.94 ; 2323.14,1125.81 cw(c3897.86,408.96) 5472.62,1125.76 ; 5764.7,1424.19 cw(c6481.55,2998.91) 5764.76,4573.66

## Text inside footprints (layer, text, board x,y; h text height)
Designator41: Bottom Overlay "HM-07" at 4034,2379 h60 r270; Bottom Overlay "HM-06" at 4152,2379 h60 r270; Bottom Overlay "HM-05" at 4272,2379 h60 r270; Bottom Overlay "HM-11" at 3945,2377 h60 r270